# Altium PCB Rocket_Engine_Igniter.PcbDoc
Units mm, origin at the board's own origin, x right, y up, seen from the top; angles counter-clockwise.
Board outline 130 x 70 mm, 2 copper layers (L1, L2), stack 1.595 mm thick; 66 components, 37 nets, 188 pads, 121 vias.
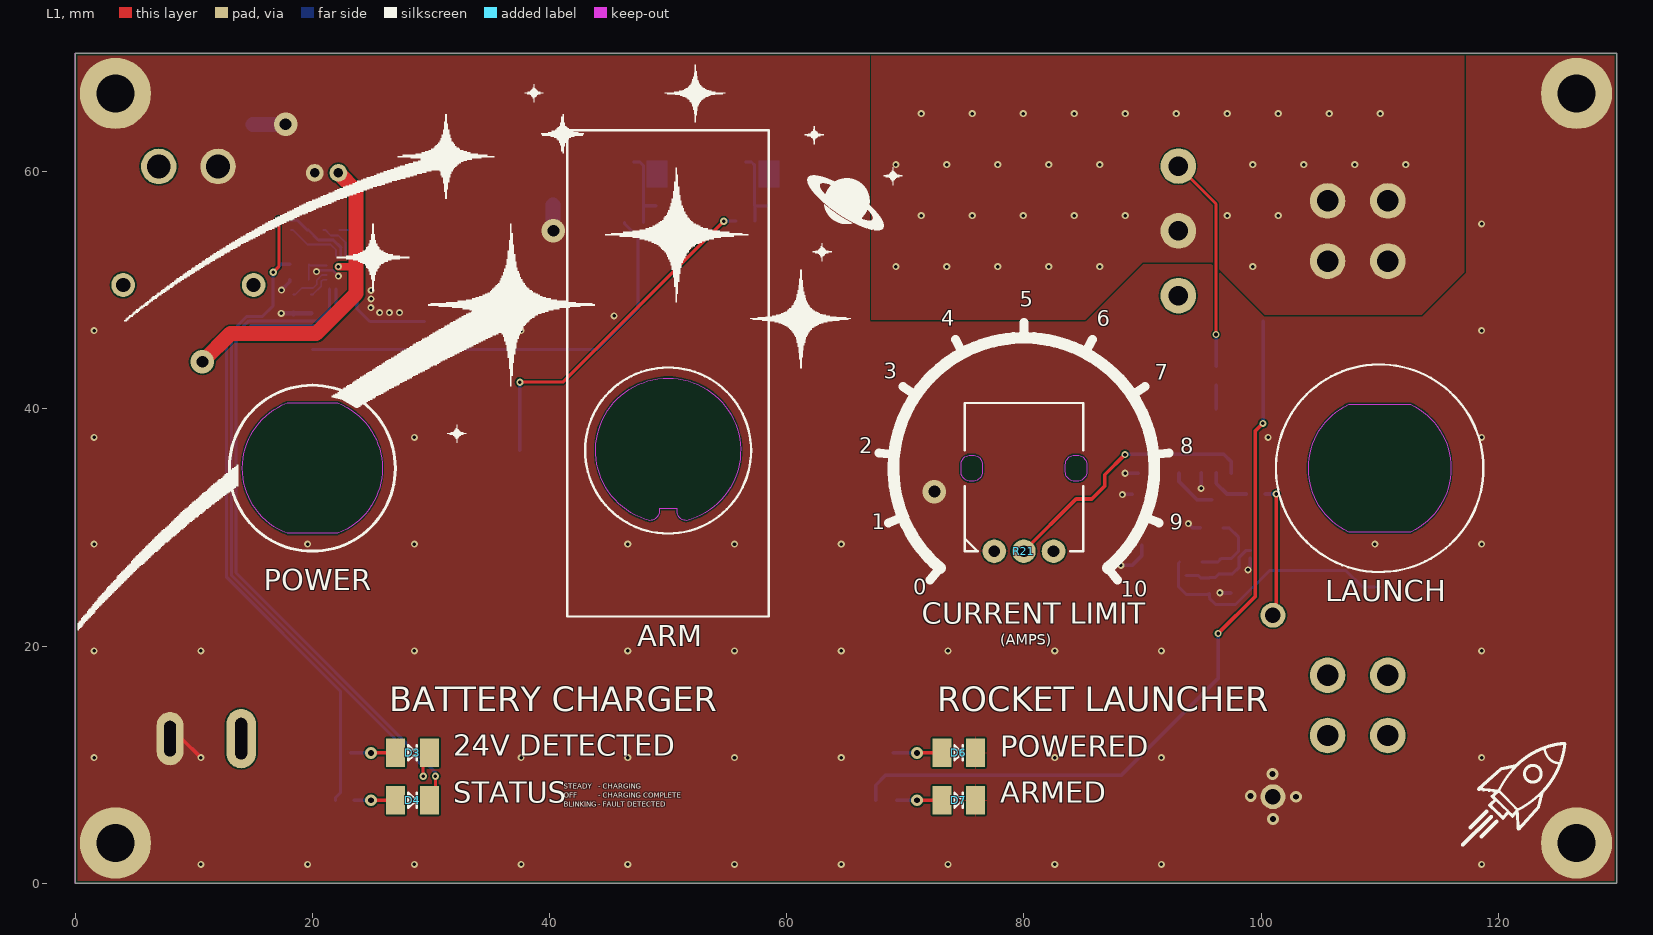
[diagram p0: L1 view]
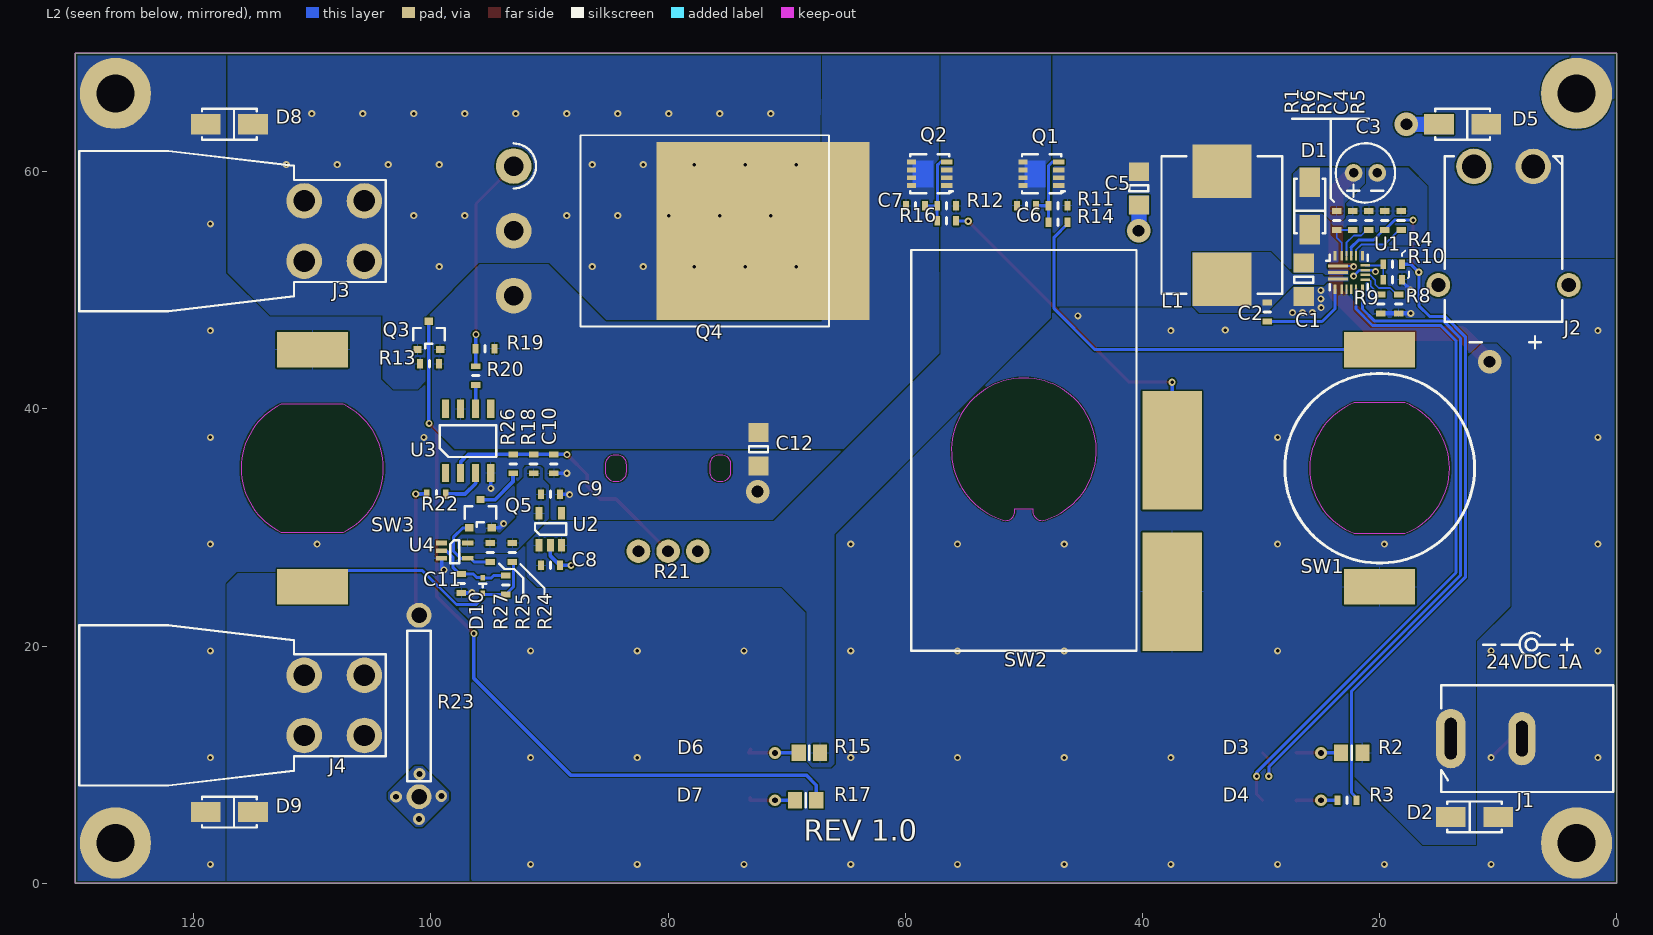
[diagram p1: L2 view, seen from below]
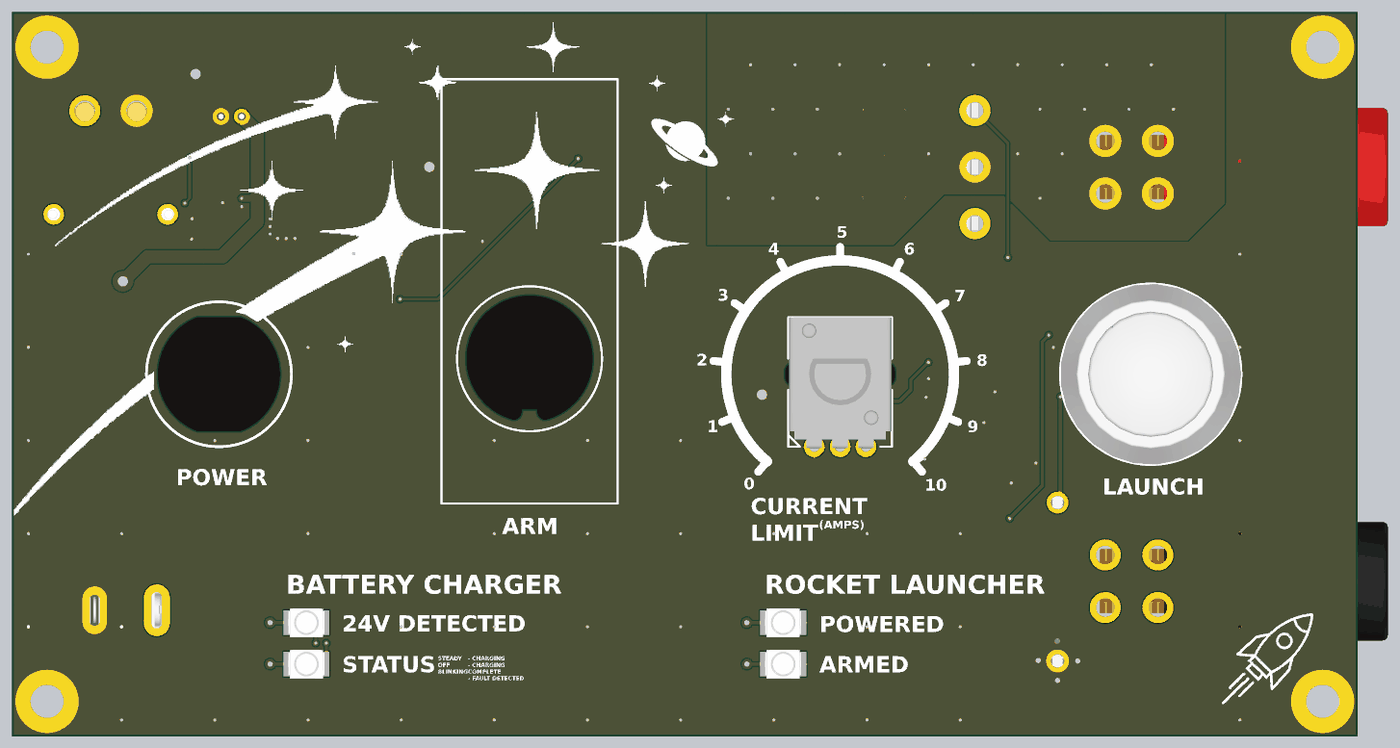
[diagram p2: 3D render of the assembled board from above, using the file's embedded part models]
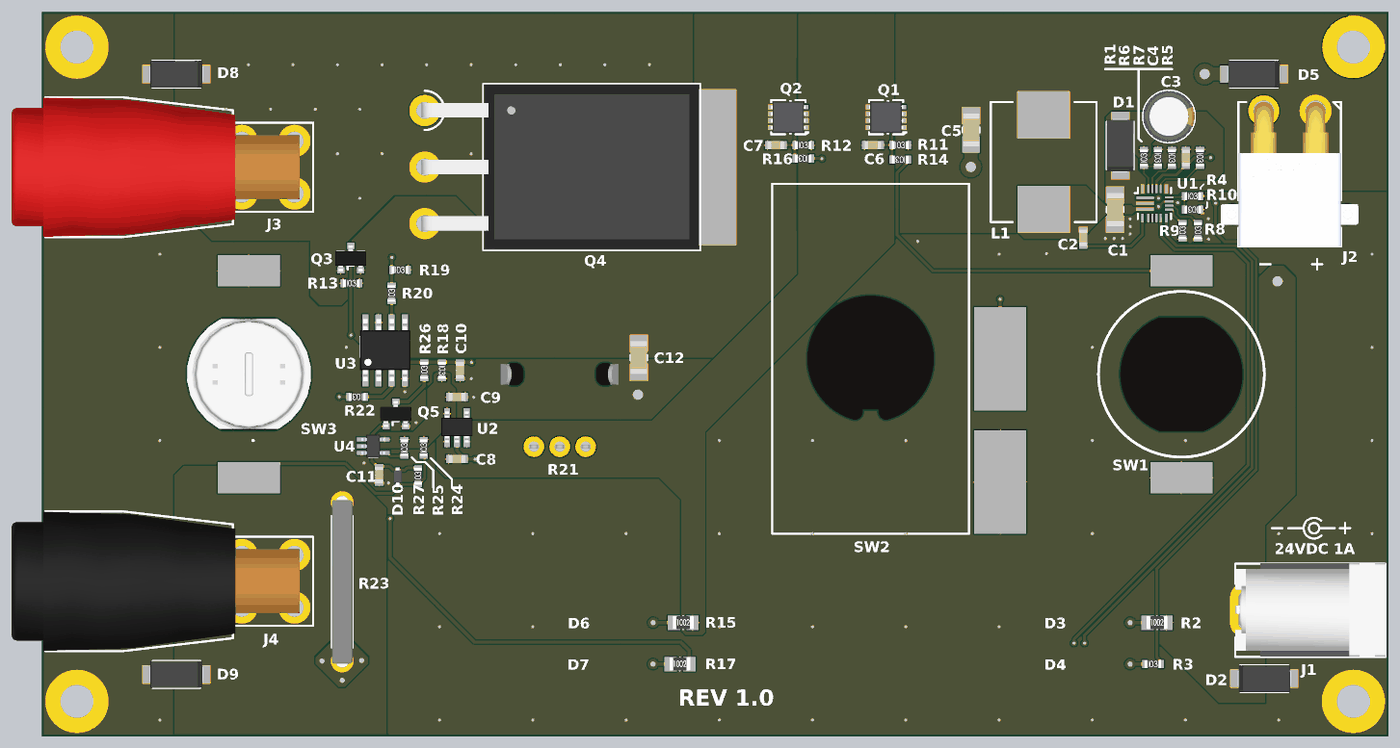
[diagram p3: 3D render of the assembled board from below, using the file's embedded part models]

## Layer stack, top to bottom
Top Solder: solder mask 0.0025, Solder Resist, Dk 0
L1: signal copper 0.0356
Core: dielectric 1.524, FR-4, Dk 4.6
L2: signal copper 0.0356
Bottom Solder: solder mask 0.0025, Solder Resist, Dk 0

## Board outline
0,0 0,70 130,70 130,0

## Design rules (kind name [scope] priority, off if disabled: settings)
BoardOutlineClearance [All] p1: gap=0.2 ignorepadtopadclearanceinfootprint=FALSE
Clearance "Stitching GND" [IsStitchingVia and InNet('GND') vs (IsVia and (Not IsStitchingVia)) Or IsPad] p1: gap=0.5 ignorepadtopadclearanceinfootprint=FALSE
Clearance [All] p2: gap=0.127 ignorepadtopadclearanceinfootprint=TRUE except(0.254: Arc-Hole Track-Hole SMDPad-Hole THPad-Hole Via-Hole Fill-Hole Poly-Hole Region-Hole Text-Hole)
ComponentClearance [All] p1: gap=0.127 collisioncheckmode=3 verticalgap=0.127 showdistances=TRUE
DiffPairsRouting [All] p1: maxlimit=0.254 minlimit=0.127 mostfreqgap=0.127 toplayer_minwidth=0.127 toplayer_maxwidth=25.4 toplayer_prefwidth=0.127 bottomlayer_minwidth=0.127 bottomlayer_maxwidth=25.4 bottomlayer_prefwidth=0.127 substack1={7DE501ED-5BBC-4F5D-AB80-627B5EEE46F3} toplayer_{7de501ed-5bbc-4f5d-ab80-627b5eee46f3}_minwidth=0.381 toplayer_{7de501ed-5bbc-4f5d-ab80-627b5eee46f3}_maxwidth=0.381 toplayer_{7de501ed-5bbc-4f5d-ab80-627b5eee46f3}_prefwidth=0.381 bottomlayer_{7de501ed-5bbc-4f5d-ab80-627b5eee46f3}_minwidth=0.381 bottomlayer_{7de501ed-5bbc-4f5d-ab80-627b5eee46f3}_maxwidth=0.381 bottomlayer_{7de501ed-5bbc-4f5d-ab80-627b5eee46f3}_prefwidth=0.381 substack2={A7599857-A2FC-403C-849A-AB8718AB1F0A} toplayer_{a7599857-a2fc-403c-849a-ab8718ab1f0a}_minwidth=0.381 toplayer_{a7599857-a2fc-403c-849a-ab8718ab1f0a}_maxwidth=0.381 toplayer_{a7599857-a2fc-403c-849a-ab8718ab1f0a}_prefwidth=0.381 bottomlayer_{a7599857-a2fc-403c-849a-ab8718ab1f0a}_minwidth=0.381 bottomlayer_{a7599857-a2fc-403c-849a-ab8718ab1f0a}_maxwidth=0.381 bottomlayer_{a7599857-a2fc-403c-849a-ab8718ab1f0a}_prefwidth=0.381 maxuncoupledlength=12.7
Height [All] p1: minheight=0 maxheight=1816.048 prefheight=12.7
HoleSize [All] p1: absolutevalues=TRUE maxlimit=6.3 minlimit=0.3 maxpercent=80.000 minpercent=20.000
HoleToHoleClearance [All] p1: gap=0.254 allowstackedmicrovias=FALSE
MinimumAnnularRing [All] p1: minimumring=0.15
MinimumSolderMaskSliver [All] p1: minsoldermaskwidth=0.1
PlaneClearance [All] p1: clearance=0.127
PlaneConnect PlaneConnectPowerPads [InPadClass('PowerPads')] p1: planeconnectstyle=Direct reliefexpansion=0.508 reliefentries=4 reliefconductorwidth=0.254 reliefairgap=0.254
PlaneConnect [All] p2: pad.planeconnectstyle=Relief pad.reliefexpansion=0.3 pad.reliefentries=4 pad.reliefconductorwidth=0.127 pad.reliefairgap=0.127 via.planeconnectstyle=Direct via.reliefexpansion=0.3 via.reliefentries=4 via.reliefconductorwidth=0.127 via.reliefairgap=0.127
PolygonConnect PolygonConnectPowerPads [All vs (InPadClass('PowerPads'))] p1: connectstyle=Direct reliefconductorwidth=0.254 reliefentries=4 polygonreliefangle="90 Angle" airgapwidth=0.254
PolygonConnect [All] p2: thpad.connectstyle=Relief thpad.reliefconductorwidth=0.127 thpad.reliefentries=4 thpad.polygonreliefangle="90 Angle" thpad.airgapwidth=0.127 smdpad.connectstyle=Relief smdpad.reliefconductorwidth=0.127 smdpad.reliefentries=4 smdpad.polygonreliefangle="90 Angle" smdpad.airgapwidth=0.127 via.connectstyle=Direct via.reliefconductorwidth=0.127 via.reliefentries=4 via.polygonreliefangle="90 Angle" via.airgapwidth=0.127
RoutingVias [All] p1: holewidth=0.3 width=0.6 viastyle="Through Hole" minholewidth=0.3 minwidth=0.6 maxholewidth=6.3 maxwidth=6.6
SilkToSilkClearance [All] p1: silktosilkclearance=0.127
SilkToSolderMaskClearance [IsPad] p1: minsilkscreentomaskgap=0.127 clearancetoexposedcopper=TRUE
SolderMaskExpansion [All] p1: expansion=0.05 istentingtop=FALSE
UnRoutedNet [All] p1: checkbadconnections=TRUE
Width Width_10mil [All] p1: maxlimit=25.4 minlimit=0.127 preferedwidth=0.254 substack1={7DE501ED-5BBC-4F5D-AB80-627B5EEE46F3} substack2={A7599857-A2FC-403C-849A-AB8718AB1F0A} minimp=50.000000 maximp=50.000000 favimp=50.000000
Width Width_6mil [All] p2: maxlimit=25.4 minlimit=0.152 preferedwidth=0.152 substack1={7DE501ED-5BBC-4F5D-AB80-627B5EEE46F3} substack2={A7599857-A2FC-403C-849A-AB8718AB1F0A} minimp=50.000000 maximp=50.000000 favimp=50.000000
Width Power_20mil [All] p3: maxlimit=25.4 minlimit=0.508 preferedwidth=0.508 substack1={7DE501ED-5BBC-4F5D-AB80-627B5EEE46F3} substack2={A7599857-A2FC-403C-849A-AB8718AB1F0A} minimp=50.000000 maximp=50.000000 favimp=50.000000
Width Power_12mil [All] p4: maxlimit=25.4 minlimit=0.305 preferedwidth=0.305 substack1={7DE501ED-5BBC-4F5D-AB80-627B5EEE46F3} substack2={A7599857-A2FC-403C-849A-AB8718AB1F0A} minimp=50.000000 maximp=50.000000 favimp=50.000000
Width Width_5mil [All] p5: maxlimit=25.4 minlimit=0.127 preferedwidth=0.127 substack1={7DE501ED-5BBC-4F5D-AB80-627B5EEE46F3} substack2={A7599857-A2FC-403C-849A-AB8718AB1F0A} minimp=50.000000 maximp=50.000000 favimp=50.000000
19 further rules are at their usual default settings.

## Classes and differential pairs
component class Pulse_Generator: C10 C11 D8 D9 D10 J3 J4 Q4 Q5 R18 R19 R20 R21 R22 R23 R24 R25 R26 R27 SW3 U3 U4
component class Power: C5 C6 C7 C8 C9 C12 D5 D6 D7 J2 Q1 Q2 Q3 R11 R12 R13 R14 R15 R16 R17 SW1 SW2 U2
component class Charger: C1 C2 C3 C4 D1 D2 D3 D4 J1 L1 R1 R2 R3 R4 R5 R6 R7 R8 R9 R10 U1
pad class PowerPads: C1-1 C1-2 C2-1 C2-2 C3-1 C3-2 C5-1 C5-2 C12-1 C12-2 D1-1 D1-2 D2-1 D2-2 D5-1 D5-2 D8-1 D8-2 D9-1 D9-2 Free-H1 Free-H2 Free-H3 Free-H4 J1-1 J1-2 J2-1 J2-2 J3-1 J4-1 L1-1 L1-2 Q1-1 Q1-2 Q1-3 Q1-5 Q1-6 Q1-7 Q1-8 Q2-1 Q2-2 Q2-3 Q2-5 Q2-6 Q2-7 Q2-8 Q4-1 Q4-2 Q4-3 R23-1 R23-2 U1-2 U1-3 U1-14 U1-19

## Components (designator, comment, footprint, x,y, rotation, side; value= is the part's Value field where it differs from the comment)
C1 "" 1206_CAP 26.4,50.9 r90 bottom
C2 "" 0603_CAP 29.475,48.175 r270 bottom
C3 "" CAP_RADIAL_5MMx11MM 22.2,59.9 r180 bottom
C4 "" 0603_CAP 19.556,55.9 r270 bottom
C5 "" 1206_CAP 40.3,58.6 r90 bottom
C6 "" 0603_CAP 49.775,57.133 r0 bottom
C7 "" 0603_CAP 59.143,57.125 r0 bottom
C8 "" 0603_CAP 89.924,26.805 r0 bottom
C9 "" 0603_CAP 89.924,32.8 r0 bottom
C10 "" 0603_CAP 89.625,35.375 r90 bottom
C11 "" 0603_CAP 97.438,25.275 r90 bottom
C12 "" 1206_CAP 72.375,36.6 r90 bottom
D1 "*" DO-214AC_SMA 25.9,57.1 r90 bottom
D2 "*" DO-214AC_SMA 12,5.6 r180 bottom
D3 "*" LED_1411 28.45,11 r180 top
D4 "*" LED_1411 28.45,7 r180 top
D5 "*" DO-214AC_SMA 13,64 r0 bottom
D6 "*" LED_1411 74.5,11 r180 top
D7 "*" LED_1411 74.5,7 r180 top
D8 "*" DO-214AC_SMA 117,64 r0 bottom
D9 "*" DO-214AC_SMA 117,6 r0 bottom
D10 "*" SOD-523 95.634,25.77 r270 bottom
J1 "*" CONN_BARREL_PLUG_PJ-037A 14,12.2 r180 bottom
J2 "" CONN_PLUG_XT30PW-M 9.55,55.45 r0 bottom
J3 "*" CONN_BANANA_RED_CT3151SP-2 108.15,55 r180 bottom locked
J4 "*" CONN_BANANA_BLK_CT3151SP-0 108.15,15 r180 bottom locked
L1 "" IND_AMRM00101040220MA1 33.3,55.5 r90 bottom
Q1 "*" PFET_POWERPAK_1212-8 48.505,59.825 r0 bottom
Q2 "*" PFET_POWERPAK_1212-8 57.943,59.825 r0 bottom
Q3 "*" SOT-23-3 101.125,45.025 r180 bottom
Q4 "*" TO-247AC_NOHOLE 66.513,63.015 r270 bottom
Q5 "*" SOT-23-3 96.775,29.98 r180 bottom
R1 "" 0603_RES 23.625,55.9 r90 bottom
R2 "" 0805_RES 22.35,11 r180 bottom
R3 "" 0603_RES 22.75,7 r180 bottom
R4 "" 0603_RES 18.9,52.2 r180 bottom
R5 "" 0603_RES 18.2,55.9 r270 bottom
R6 "" 0603_RES 22.269,55.9 r270 bottom
R7 "" 0603_RES 20.913,55.9 r270 bottom
R8 "" 0603_RES 18.4,48.85 r90 bottom
R9 "" 0603_RES 19.9,48.85 r90 bottom
R10 "" 0603_RES 18.9,50.9 r0 bottom
R11 "" 0603_RES 47.14,57.133 r180 bottom
R12 "" 0603_RES 56.507,57.125 r180 bottom
R13 "" 0603_RES 100.125,43.8 r180 bottom
R14 "" 0603_RES 47.14,55.733 r0 bottom
R15 "" 0805_RES 68.086,11 r180 bottom
R16 "" 0603_RES 56.507,55.85 r0 bottom
R17 "" 0805_RES 68.4,7 r180 bottom
R18 "" 0603_RES 91.35,35.375 r270 bottom
R19 "" 0603_RES 95.425,45.089 r180 bottom
R20 "" 0603_RES 96.225,42.8 r90 bottom
R21 "" POT_PTV09A-4x15F-xxxx 80,35 r0 top locked
R22 "" 0603_RES 99.55,32.825 r0 bottom
R23 "" RES_BR3FB50L0_0R05_1% 101,7.3 r90 bottom
R24 "" 0603_RES 93.125,27.9 r90 bottom
R25 "" 0603_RES 95,27.9 r90 bottom
R26 "" 0603_RES 93.075,35.375 r90 bottom
R27 "" 0603_RES 93.682,25.15 r90 bottom
SW1 "*" SW_KEYLOCK_SW-R-K1-A 20,35 r0 top locked
SW2 "*" SW_TOGGLE_MCR13-28A-01 50,36.5 r0 top locked
SW3 "*" SW_PUSHBUTTON_PV5S24019 110,35 r0 top locked
U1 "" QFN-19 22.6,51.5 r180 bottom
U2 "TPS7A2425DBVR" SOT-23-5 90.875,28.5 r90 bottom
U3 "*" SOIC-8_TI_PACKAGE_D 98.77,34.6 r90 bottom
U4 "*" SOT-353 98,28.05 r180 bottom

## Footprints (in the part's own frame and the unit in brackets; to place one, negate y for a bottom-side part, rotate by r counter-clockwise, add the part's x,y. Pads: shape width x height; smd on the part's side, far side on the other; paste and mask are expansions set on the pad)
0603_CAP [mm]
  rect 0.5x0.8 smd: 1(-0.8,0) 2(0.8,0)
  silkscreen extent 0,-0.28 0,0.28, body extent -0.8,-0.4 0.8,0.4, height 0.8
0603_RES [mm]
  rect 0.5x0.8 smd: 1(-0.8,0) 2(0.8,0)
  silkscreen extent 0,-0.28 0,0.28, body extent -0.8,-0.4 0.8,0.4, height 0.45
0805_RES [mm]
  rect 1.2x1.4 smd: 1(-0.9,0) 2(0.9,0)
  silkscreen extent 0,-0.6 0,0.6, body extent -1,-0.62 1,0.63, height 0.5
1206_CAP [mm]
  rect 1.6x1.7 smd: 1(-1.4,0) 2(1.4,0)
  silkscreen extent -0.25,-0.8 0.25,0.8, body extent -1.6,-0.8 1.6,0.8, height 0.79
CAP_RADIAL_5MMx11MM [mm]
  round 1.5 hole 0.8: 1(0,0) 2(2,0)
  silkscreen extent -1.5,-2.5 3.5,2.5, body extent -1.5,-2.5 3.5,2.5, height 11
CONN_BANANA_BLK_CT3151SP-0 [mm]
  round 3 hole 1.8: 1(-2.54,-2.54) 1(-2.54,2.54) 1(2.54,-2.54) 1(2.54,2.54)
  silkscreen extent -21.5,-6.75 4.35,6.75, body extent -24.74,-6.73 3.06,6.73, height 14.35
CONN_BANANA_RED_CT3151SP-2 [mm]
  round 3 hole 1.8: 1(-2.54,-2.54) 1(-2.54,2.54) 1(2.54,-2.54) 1(2.54,2.54)
  silkscreen extent -21.5,-6.75 4.35,6.75, body extent -24.74,-6.73 3.06,6.73, height 14.35
CONN_BARREL_PLUG_PJ-037A [mm]
  oval 2.5x5 hole 1 slot 3.5 at 90 deg: 1(0,0)
  oval 2.25x4.5 hole 1 slot 3 at 90 deg: 2(6,0)
  silkscreen extent -0.8,-4.5 13.7,4.5, body extent -0.8,-4.45 13.7,4.55, height 11
CONN_PLUG_XT30PW-M [mm]
  round 3 hole 2: 1(-2.5,-5) 2(2.5,-5)
  round 2 hole 1.2: 3(5.5,5) 4(-5.5,5)
  silkscreen extent -4.95,-5.85 4.95,8.1, body extent -6.65,-5.85 6.65,8.1, height 5.5
DO-214AC_SMA [mm]
  rect 2.5x1.7 smd: 1(-2,0) 2(2,0)
  silkscreen extent -2.3,-1.3 2.3,1.3, body extent -2.6,-1.3 2.6,1.3, height 2.4
IND_AMRM00101040220MA1 [mm]
  rect 4.5x5 smd: 1(-4.55,0) 2(4.55,0)
  silkscreen extent -5.8,-5.1 5.8,5.1, body extent -5.8,-5.1 5.8,5.09, height 3.8
LED_1411 [mm]
  rect 1.6x2.4 smd: 1(-1.425,0) 2(1.425,0)
  silkscreen extent -0.35,-0.63 0.35,0.63, body extent -1.75,-1.4 1.75,1.4, height 1.75
PFET_POWERPAK_1212-8 [mm]
  rect 0.99x0.405 smd: 1(-1.435,0.992) 2(-1.435,0.333) 3(-1.435,-0.333) 4(-1.435,-0.992)
  rect 0.76x0.405 smd: 5(1.55,-0.992) 6(1.55,-0.333) 7(1.55,0.333) 8(1.55,0.992)
  L1 region: -0.305,1.118 1.42,1.118 1.42,-1.118 -0.305,-1.118
  silkscreen extent -1.95,-1.65 1.65,1.65, body extent -1.65,-1.65 1.65,1.65, height 1.12
POT_PTV09A-4x15F-xxxx [mm]
  round 2 hole 1: 1(-2.5,-7) 2(0,-7) 3(2.5,-7)
  Keep-Out Layer region: 3.5,-0.3 3.5,0.3 3.561,0.606 3.734,0.866 3.994,1.039 4.3,1.1 4.3,1.1 4.5,1.1 4.806,1.039 5.066,0.866 5.239,0.606 5.3,0.3 5.3,0.3 5.3,-0.3 5.239,-0.606 5.066,-0.866 4.806,-1.039 4.5,-1.1 4.5,-1.1 4.3,-1.1 3.994,-1.039 3.734,-0.866 3.561,-0.606 3.5,-0.3
  Keep-Out Layer region: -5.3,-0.3 -5.3,0.3 -5.239,0.606 -5.066,0.866 -4.806,1.039 -4.5,1.1 -4.5,1.1 -4.3,1.1 -3.994,1.039 -3.734,0.866 -3.561,0.606 -3.5,0.3 -3.5,0.3 -3.5,-0.3 -3.561,-0.606 -3.734,-0.866 -3.994,-1.039 -4.3,-1.1 -4.3,-1.1 -4.5,-1.1 -4.806,-1.039 -5.066,-0.866 -5.239,-0.606 -5.3,-0.3
  silkscreen extent -12.23,-9.42 12.23,12.3, body extent -9.65,-9.65 9.65,9.65, height 20.3
QFN-19 [mm]
  rect 1.7x0.25 smd: 1(-0.9,0.55) 2(-0.9,0) 3(-0.9,-0.55)
  rect 0.25x0.8 smd: 4(-1.15,-1.4) 9(1.15,-1.4) 14(1.15,1.4) 19(-1.15,1.4)
  rect 0.2x0.8 smd: 5(-0.6,-1.4) 6(-0.2,-1.4) 7(0.2,-1.4) 8(0.6,-1.4) 15(0.6,1.4) 16(0.2,1.4) 17(-0.2,1.4) 18(-0.6,1.4)
  rect 0.8x0.2 smd: 10(1.4,-0.6) 11(1.4,-0.2) 12(1.4,0.2) 13(1.4,0.6)
  silkscreen extent -1.9,-1.5 1.6,1.5, body extent -1.5,-1.5 1.5,1.5, height 0.9
RES_BR3FB50L0_0R05_1% [mm]
  round 2.1 hole 1.3: 1(0,0) 2(15.3,0)
  silkscreen extent 1.3,-1 14,1, body extent -0.62,-1 15.93,1, height 15.3
SOD-523 [mm]
  rect 0.48x0.4 smd: 1(0,0) 2(1.32,0)
  silkscreen extent 0.5,-0.3 0.82,0.3, body extent -0.15,-0.4 1.45,0.4, height 0.7
SOIC-8_TI_PACKAGE_D [mm]
  rect 1.55x0.6 smd: 1(0,0) 2(0,-1.27) 3(0,-2.54) 4(0,-3.81) 5(5.4,-3.81) 6(5.4,-2.54) 7(5.4,-1.27) 8(5.4,0)
  silkscreen extent 1.35,-4.28 4.03,0.48, body extent -0.27,-4.37 5.73,0.53, height 1.75
SOT-23-3 [mm]
  rect 0.7x0.6 smd: 1(0,0) 2(1.9,0) 3(0.95,2.37)
  silkscreen extent -0.38,0.1 2.27,1.8, body extent -0.55,-0.07 2.45,2.43, height 1.1
SOT-23-5 [mm]
  rect 1.05x0.6 smd: 1(0,0) 2(0,-0.95) 3(0,-1.9) 4(2.7,-1.9) 5(2.7,0)
  silkscreen extent 0.87,-2.27 1.85,0.35, body extent -0.1,-2.45 2.9,0.55, height 1.45
SOT-353 [mm]
  rect 0.95x0.4 smd: 1(-1.1,0.65) 2(-1.1,0) 3(-1.1,-0.65) 4(1.1,-0.65) 5(1.1,0.65)
  silkscreen extent -0.38,-1.07 0.38,0.88, body extent -1.14,-1.12 1.14,1.12, height 1.1
SW_KEYLOCK_SW-R-K1-A [mm]
  rect 6x3 smd far side: 1(0,10) 2(0,-10)
  Keep-Out Layer region: -2.135,-5.5 -4.434,-3.892 -5.731,-1.403 -5.731,1.403 -4.434,3.892 -2.135,5.5 -2.135,5.5 -2.135,5.5 2.135,5.5 2.135,5.5 4.434,3.892 5.731,1.403 5.731,-1.403 4.434,-3.892 2.135,-5.5 2.135,-5.5 2.135,-5.5
  silkscreen extent -7,-7 7,7, body extent -7.5,-7.5 7.5,7.5, height 3.5
SW_PUSHBUTTON_PV5S24019 [mm]
  rect 6x3 smd far side: 1(0,10) 2(0,-10)
  Keep-Out Layer region: -2.615,-5.4 -4.696,-3.735 -5.85,-1.333 -5.85,1.333 -4.696,3.735 -2.615,5.4 -2.615,5.4 -2.615,5.4 2.615,5.4 2.615,5.4 4.696,3.735 5.85,1.333 5.85,-1.333 4.696,-3.735 2.615,-5.4 2.615,-5.4 2.615,-5.4
  silkscreen extent -8.75,-8.75 8.75,8.75, body extent -8.75,-8.75 8.75,8.75, height 7.19
SW_TOGGLE_MCR13-28A-01 [mm]
  rect 5x10 smd far side: 1(-12.5,0) 2(-12.5,-11.9)
  Keep-Out Layer region: -1.554,-5.914 -4.109,-4.526 -5.733,-2.113 -6.057,0.776 -5.008,3.488 -2.824,5.408 0,6.1 2.824,5.408 5.008,3.488 6.057,0.776 5.733,-2.114 4.109,-4.526 1.554,-5.914 1.554,-5.914 1.248,-5.853 0.988,-5.68 0.815,-5.42 0.754,-5.114 0.754,-5.114 0.75,-5.114 0.75,-4.9 0.75,-4.9 -0.75,-4.9 -0.75,-5.114 -0.754,-5.114 -0.815,-5.42 -0.988,-5.679 -1.248,-5.853 -1.554,-5.914
  silkscreen extent -8.5,-14 8.5,27, body extent -9.5,-16.9 9.5,16.88, height 24.4
TO-247AC_NOHOLE [mm]
  round 3 hole 1.651 paste-2539.97 mask+0: 1(2.54,-26.512) 2(8,-26.512) 3(13.46,-26.512)
  rect 15x18 smd: 2(8.015,-5.487)
  silkscreen extent -0.06,-26.52 16.06,0.07, body extent 0.05,-26.85 15.92,-0.05, height 5.36

## Part data
C1: library part CAP_1206_2.2uF, Capacitance=2.2uF, Case=1206, Dielectric=X7R, Manufacturer="Samsung Electro-Mechanics", Part Number=CL31B225KBHNFNE, Tolerance=10%, Voltage=50V
C2: library part CAP_0603_100nF, Capacitance=100nF, Dielectric=X7R, Manufacturer="Samsung Electro-Mechanics", Part Number=CL10B104KB8NNWC, Tolerance=10%, Voltage=50V
C3: library part CAP_RADIAL_47uF, Capacitance=47uF, Case="Radial, Can", Manufacturer="Würth Elektronik", Part Number=860020572006, Tolerance=20%, Voltage=35V
C4 C8: library part CAP_0603_1uF, Capacitance=1uF, Dielectric=X7R, Manufacturer="Samsung Electro-Mechanics", Part Number=CL10B105KA8NNNC, Tolerance=10%, Voltage=25V
C5 C12: library part CAP_1206_10uF, Capacitance=10uF, Dielectric=X5R, Manufacturer="Samsung Electro-Mechanics", Part Number=CL31A106MBHNNNE, Tolerance=20%, Voltage=50V
C6 C7: library part CAP_0603_10nF, Capacitance=10nF, Dielectric=X7R, Manufacturer="Samsung Electro-Mechanics", Part Number=CL10B103KB8NNNC, Tolerance=10%, Voltage=50V
C9: library part CAP_0603_2.2uF, Capacitance=2.2uF, Dielectric=X7R, Manufacturer="Samsung Electro-Mechanics", Part Number=CL10B225KP8NNNC, Tolerance=10%, Voltage=10V
C10: library part CAP_0603_1nF, Capacitance=1nF, Dielectric=X7R, Manufacturer="KYOCERA AVX", Part Number=KGM15AR71H102KT, Tolerance=10%, Voltage=50V
C11: library part CAP_0603_3.3nF, Capacitance=3.3nF, Dielectric=X7R, Manufacturer="Samsung Electro-Mechanics", Part Number=CL10B332KB8NNNC, Tolerance=10%, Voltage=50V
D1: library part DIODE_SCHOTTKY_40V_2A, Average Forward Current=2A, Manufacturer="Diodes Incorporated", Max Reverse Voltage=40V, Package=DO-214AC_SMA, Part Number=B240AE-13
D2: library part DIODE_TVS_33V_UNIDIR, Manufacturer="Diodes Incorporated", Package=DO-214AC_SMA, Part Number=SMAJ33AQ-13-F, Reverse Standoff Voltage=33V
D3: library part LED_BLUE_150141BS73100, Manufacturer="Würth Elektronik", Package="SMD 1411", Part Number=150141BS73100
D4: library part LED_AMBER_150141AS73100, Manufacturer="Würth Elektronik", Package="SMD 1411", Part Number=150141AS73100
D5 D8 D9: library part DIODE_TVS_20V_UNIDIR, Manufacturer="Diodes Incorporated", Package=DO-214AC_SMA, Part Number=SMAJ20AQ-13-F, Reverse Standoff Voltage=20V
D6: library part LED_GREEN_150141GS73100, Manufacturer="Würth Elektronik", Package="SMD 1411", Part Number=150141GS73100
D7: library part LED_RED_150141RS73100, Manufacturer="Würth Elektronik", Package="SMD 1411", Part Number=150141RS73100
D10: library part DIODE_RB520S30T5G, Manufacturer="ON Semiconductor", Max Reverse Voltage=30V, Package=SOD-523, Part Number=RB520S30T5G
J1: library part CONN_BARREL_PLUG_PJ-037A, Manufacturer="CUI Devices", Max Current=2.5A, Part Number=PJ-037A, Rated Voltage=24V, Mating Diameter="2.1mm ID, 5.5mm OD"
J2: library part CONN_PLUG_XT30PW-M, Manufacturer=AMASS, Part Number=XT30PW-M
J3: library part CONN_BANANA_RED_CT3151SP-2, Colour=Red, Manufacturer="Cal Test Electronics", Part Number=CT3151SP-2
J4: library part CONN_BANANA_BLK_CT3151SP-2_1, Colour=Black, Manufacturer="Cal Test Electronics", Part Number=CT3151SP-0
L1: library part IND_AMRM00101040220MA1_22U0, Inductance=22uH, Manufacturer="Pulse Electronics", Part Number=AMRM00101040220MA1, Saturation Current=5A, Tolerance=20%, DCR=0.066Ohm
Q1 Q2: library part PFET_SIS413DN, Manufacturer="Vishay Siliconix", Package="PowerPAK® 1212-8", Part Number=SIS413DN-T1-GE3
Q3: library part PFET_DMP610DL, Manufacturer="Diodes Incorporated", Package=SOT-23-3, Part Number=DMP610DL-7
Q4: library part PFET_IRFP9140, Manufacturer=Vishay, Package=TO-247-3, Part Number=IRFP9140PBF
Q5: library part NFET_AS2302, Manufacturer="ANBON SEMICONDUCTOR (INT'L) LIMITED", Package=SOT-23-3, Part Number=AS2302
R1 R4 R11 R12 R19: library part RES_0603_10K, Manufacturer="Stackpole Electronics Inc", Part Number=RMCF0603FT10K0, Power Rating=0.1W, Resistance=10K, Temperature Coefficient=100ppm, Tolerance=1%
R2: library part RES_0805_2K0, Manufacturer="Stackpole Electronics Inc", Part Number=RNCP0805FTD2K00, Power Rating=0.25W, Resistance=2K0, Temperature Coefficient=100ppm, Tolerance=1%
R3: library part RES_0603_330R, Manufacturer="Stackpole Electronics Inc", Part Number=RMCF0603FT330R, Power Rating=0.1W, Resistance=330R, Temperature Coefficient=100ppm, Tolerance=1%
R5 R7: library part RES_0603_95K3, Manufacturer="Stackpole Electronics Inc.", Part Number=RMCF0603FT95K3, Power Rating=0.1W, Resistance=95K3, Temperature Coefficient=100ppm, Tolerance=1%
R6: library part RES_0603_150K, Manufacturer="Stackpole Electronics Inc", Part Number=RMCF0603FG150K, Power Rating=0.1W, Resistance=150K, Temperature Coefficient=100ppm, Tolerance=1%
R8 R13 R25: library part RES_0603_100K, Manufacturer=Stackpole, Part Number=RMCF0603FT100K, Power Rating=0.1W, Resistance=100K, Temperature Coefficient=100ppm, Tolerance=1%
R9: library part RES_0603_NOSTUFF, NOSTUFF=NOSTUFF
R10: library part RES_0603_15K, Manufacturer="Stackpole Electronics Inc", Part Number=RMCF0603FG15K0, Power Rating=0.1W, Resistance=15K, Temperature Coefficient=100ppm, Tolerance=1%
R14 R16: library part RES_0603_1K, Manufacturer="Stackpole Electronics Inc", Part Number=RMCF0603FT1K00, Power Rating=0.1W, Resistance=1K, Temperature Coefficient=100ppm, Tolerance=1%
R15: library part RES_0805_560R, Manufacturer="Vishay Dale", Part Number=CRCW0805560RFKEAHP, Power Rating=0.5W, Resistance=560R, Temperature Coefficient=100ppm, Tolerance=1%
R17: library part RES_0805_680R, Manufacturer="Vishay Dale", Part Number=RCS0805680RFKEA, Power Rating=0.5W, Resistance=680R, Temperature Coefficient=100ppm, Tolerance=1%
R18 R24 R27: library part RES_0603_4K02, Manufacturer="Stackpole Electronics Inc", Part Number=RMCF0603FT4K02, Power Rating=0.1W, Resistance=4K02, Temperature Coefficient=100ppm, Tolerance=1%
R20: library part RES_0603_10R, Manufacturer="Stackpole Electronics Inc", Part Number=RMCF0603FT10R0, Power Rating=0.1W, Resistance=10R, Temperature Coefficient=100ppm, Tolerance=1%
R21: library part POT_1K_PTV09A-4015F-B102, Manufacturer="Bourns Inc.", Part Number=PTV09A-4015F-B102, Power Rating=0.05W, Resistance=1K, Tolerance=20%
R22 R26: library part RES_0603_0R0, Resistance=0R0
R23: library part RES_BR3FB50L0_0R05_1%, Manufacturer="Stackpole Electronics", Part Number=BR3FB50L0, Power Rating=3W, Resistance=0R05, Tolerance=1%
SW1: library part SW_KEYLOCK_SW-R-K1-A, Manufacturer="Adam Tech", Part Number=SW-R-K1-A
SW2: library part SW_TOGGLE_MCR13-28A-01, Manufacturer=Multicomp, Part Number=MCR13-28A-01
SW3: library part SW_PUSHBUTTON_PV5S24019, Manufacturer=E-Switch, Part Number=PV5S24019
U1: library part MP2659, Manufacturer="Monolithic Power Systems", Package=QFN-19, Part Number=MP2659-0000
U2: Manufacturer="Texas Instruments", Package=SOT-23-5, Part Number=TPS7A2425DBVR
U3: library part LM7321, Manufacturer="Texas Instruments", Package=SOIC-8, Part Number=LM7321MAX/NOPB
U4: library part SN74LVC1G17, Manufacturer="Texas Instruments", Package=SOT-353, Part Number=SN74LVC1G17DCKR

## Free pads (board coordinates)
  round 6 hole 3.2: H1(3.4,66.6) H2(3.4,3.4) H3(126.6,3.4) H4(126.6,66.6)

## Via types
v1: diameter 0.6, hole 0.3, L1 to L2, tented both sides, 109 vias
v2: diameter 1, hole 0.5, L1 to L2, tented both sides, 8 vias
v3: diameter 2, hole 1, L1 to L2, tented both sides, 4 vias

## Nets (pads, with @x,y where several pads share a name; then routed paths per layer and width w, separated by ;. In a path a pad name is that pad's centre, name@x,y a point inside that pad or via, vN(x,y) a via of type N, cw(c..) or ccw(c..) an arc to the next point about the centre after c; other vN are vias at no path point)
CHGR_ACOK_N: D3.1 U1.9 | length 56.8
  L1 w0.254: v1(29.35,9.025) 29.35,10.475 D3.1
  L2 w0.254: U1.9 21.45,48.425 20.45,47.425 14.65,47.425 13.175,45.95 13.175,25.975 29.35,9.8 v1(29.35,9.025)
CHGR_BST: C2.2 U1.4 | length 7.8
  L2 w0.254: U1.4 23.75,48.475 24.85,47.375 C2.2
CHGR_CELL: R9.2 U1.10 | length 2.1
  L2 w0.152: R9.2 20.05,49.65 20.75,50.35 20.75,50.75 20.9,50.9 U1.10
CHGR_ILIM: R7.2 U1.17 | length 3.4
  L2 w0.152: R7.2 21.075,55.1 21.55,54.625 22.175,54.625 22.8,54 U1.17
CHGR_ISET: R5.2 U1.15 | length 5
  L2 w0.152: R5.2 18.35,55.1 19.575,53.875 21.525,53.875 22,53.4 U1.15
CHGR_NTC: R4.1 R10.2 U1.13 | length 2.8
  L2 w0.152: R10.2 19.7,52.1 R4.1 19.8,52.1 U1.13
CHGR_PMID: C1.2 D1.1 U1.2 U1.19
CHGR_STAT_N: D4.1 U1.8 | length 57.1
  L1 w0.254: D4.1 30.375,7.5 v1(30.375,9.025)
  L2 w0.254: U1.8 22,48.436 20.608,47.044 14.844,47.044 13.556,45.756 13.556,26.194 30.375,9.375 v1(30.375,9.025)
CHGR_SW: C2.1 L1.1 U1.3
CHGR_VB: R8.2 U1.11 | length 3.7
  L2 w0.152: R8.2 18.55,49.65 19.1,50.2 20.081,50.2 20.375,50.494 20.375,50.862 20.813,51.3 U1.11
CHGR_VCC_5V0: C4.2 R3.2 R4.2 U1.16 | length 64.2
  L1 w0.254: v1(16.7,51.525) 17.175,52 v1(17.175,55.925)
  L2 w0.203: U1.16 22.4,53.625
  L2 w0.254: v1(17.175,55.925) 18.731,55.925 C4.2 19.575,55.082 19.668,55.082 20.5,54.25 21.775,54.25 22.4,53.625 ; R4.2 17.375,52.2 v1(16.7,51.525) 16.7,48.707 15.799,47.806 14.492,47.806 12.775,46.089 12.775,25.8 22.375,16.2 22.375,7.64 21.95,7.215 R3.2
CHGR_VDPM: R1.1 R6.2 U1.18 | length 3.7
  L2 w0.152: R6.2 R1.1 23.625,54.425 23.2,54 U1.18
GND: C1.1 C3.2 C4.1 C5.1 C8.1 C9.1 C10.1 C11.1 C12.1 D2.2 D5.2 D6.1 D7.1 D8.2 D9.2 J1.2 J2.2 pad.H1 pad.H2 pad.H3 pad.H4 Q5.2 R5.1 R6.1 R7.1 R8.1 R9.1 R10.1 R21.1 R23.1 SW1.2 SW2.2 SW3.1 U1.5 U1.6 U1.7 U1.12 U2.2 U3.4 U4.3 | length 23.3
  L1 w0.305: J1.2 9,12.2 v1(10.6,10.6)
  L2 w0.203: v1(20.35,51.575) 20.475,51.7 U1.12 21.7,51.7 v1(22.2,51.2)
  L2 w0.305: v1(17.4,50.025) 18.1,50.725 R10.1 ; v1(88.175,26.8) 88.18,26.805 C8.1 89.925,27.606 U2.2 ; v1(88.3,32.775) 88.325,32.8 C9.1 ; v1(88.538,34.575) C10.1 ; v1(93.875,30.325) 94.22,29.98 Q5.2 ; v1(94.95,33.297) 94.96,33.307 U3.4 ; v1(96.53,24.5) 96.555,24.475 C11.1 ; v1(98.9,26.425) 99.1,26.625 U4.3
  L2 w0.381: v1(17.375,48.05) R8.1 R9.1
  L2 w1.27: D5.2 v3(17.75,64) ; C5.1 40.3,55.05 v3(40.325,55.025)
  other v1: 10.6,1.6 19.6,1.6 28.6,1.6 37.6,1.6 46.6,1.6 55.6,1.6 64.6,1.6 73.6,1.6 82.6,1.6 91.6,1.6 118.6,1.6 1.6,10.6 37.6,10.6 46.6,10.6 55.6,10.6 64.6,10.6 82.6,10.6 91.6,10.6 118.6,10.6 1.6,19.6 10.6,19.6 28.6,19.6 46.6,19.6 55.6,19.6 64.6,19.6 73.6,19.6 82.6,19.6 91.6,19.6 118.6,19.6 1.6,28.6 19.6,28.6 28.6,28.6 46.6,28.6 55.6,28.6 64.6,28.6 109.6,28.6 118.6,28.6 1.6,37.6 28.6,37.6 100.6,37.6 118.6,37.6 1.6,46.6 37.6,46.6 118.6,46.6 33.025,46.65 45.45,47.85 25.675,48.125 26.5,48.125 27.35,48.125 24.943,48.55 24.95,49.275 24.95,50 118.6,55.6
  other v2: 101,5.425 102.95,7.3 99.125,7.35 100.975,9.225
  other v3: 72.45,33.025
NetC6_1: C6.1 Q1.4 R11.1 R14.2 | length 6.8
  L2 w0.254: Q1.4 47.612,60.818 47.94,60.489 R11.1 ; R14.2 R11.1 ; C6.1 R11.1
NetC7_1: C7.1 Q2.4 R12.1 R16.2 | length 6.6
  L2 w0.254: Q2.4 57.033,60.817 57.3,60.55 57.3,57.132 R12.1 ; R16.2 R12.1 ; C7.1 R12.1
NetD3_2: D3.2 R2.1 | length 3.8
  L1 w0.305: v2(24.95,11) D3.2
  L2 w0.305: R2.1 v2(24.95,11)
NetD4_2: D4.2 R3.1 | length 3.6
  L1 w0.305: v2(24.95,7) 27,7 27.009,6.988 D4.2@27.025,6.968
  L2 w0.305: R3.1 v2(24.95,7) ; v2@24.95,6.984 24.95,6.968 v2@24.95,6.984 ; v2@24.95,6.984 v2(24.95,7) ; v2@24.95,6.984 v2(24.95,7)
NetD6_2: D6.2 R15.1 | length 4.6
  L1 w0.305: v2(70.986,11) D6.2 73.2,11 73.17,11.054 73.032,11.296 D6.2@73.061,11.3
  L2 w0.305: R15.1 v2(70.986,11)
NetD7_2: D7.2 R17.1 | length 4
  L1 w0.305: v2(71,7) D7.2 D7.2@73.075,7.191
  L2 w0.305: R17.1 v2(71,7)
NetQ3_3: Q3.3 R17.2 | length 65.6
  L1 w0.305: v1(96.375,21.063) 99.525,24.213 99.525,38.15 v1(100.15,38.775)
  L2 w0.305: R17.2 67.5,8.275 68.35,9.125 88.225,9.125 96.375,17.275 v1(96.375,21.063) ; v1(100.15,38.775) 100.175,38.8 Q3.3
NetQ4_1: Q4.1 R19.1 R20.2 | length 18.2
  L1 w0.254: Q4.1 96.2,57.3 v1(96.2,46.275)
  L2 w0.254: Q4.1@93,60.5 Q4.1
  L2 w0.305: v1(96.2,46.275) 96.225,46.25 R19.1 R20.2
NetQ5_3: Q5.3 R26.1 | length 4.1
  L2 w0.305: R26.1 93.075,33.875 94.6,32.35 Q5.3
NetR14_1: R14.1 SW1.1 | length 36.6
  L2 w0.254: SW1.1 44,45 47.448,48.448 47.448,54.477 46.34,55.585 R14.1
NetR16_1: R16.1 SW2.1 | length 29.6
  L1 w0.254: v1(37.5,42.25) 41.118,42.25 v1(54.693,55.825)
  L2 w0.254: v1(54.693,55.825) 54.718,55.85 R16.1
  L2 w0.305: SW2.1 v1(37.5,42.25)
PG_CURRENT_FB: R22.1 U3.3 | length 3.8
  L2 w0.305: U3.3 96.23,33.72 97.125,32.825 R22.1
PG_ISET: C10.2 R18.1 R21.2 R26.2 U3.2 | length 22.6
  L1 w0.305: R21.2 84.402,32.402 85.727,32.402 86.825,33.5 86.825,34.45 v1(88.525,36.15)
  L2 w0.305: v1(88.525,36.15) 88.55,36.175 C10.2 R18.1 R26.2 96.85,36.175 97.5,35.525 U3.2
PG_LAUNCH_DBNC_N: Q5.1 R25.1 U4.4 | length 6.3
  L2 w0.254: R25.1 96.347,27.1 96.647,27.4 U4.4 97.5,27.4 98.112,28.011 98.112,29.172 97.304,29.98 Q5.1
PG_LAUNCH_FLT_N: C11.2 D10.1 R27.2 U4.2 | length 7
  L2 w0.254: R27.2 94.711,25.95 94.937,25.725 95.589,25.725 D10.1 96.12,25.77 96.45,26.1 97.413,26.1 C11.2 97.575,26.075 98.15,26.65 98.15,27.5 98.7,28.05 U4.2
PG_LAUNCH_N: D10.2 R24.1 R27.1 SW3.2 | length 21.8
  L2 w0.254: R24.1 93.028,27.003 93.028,25.004 R27.1 95.534,24.35 D10.2 95.634,24.041 96.175,23.5 97.85,23.5 100.725,26.375 107.148,26.375 108.523,25 SW3.2
PG_LOAD_N: D9.1 J4.1 R22.2 R23.2 | length 11.3
  L1 w0.305: R23.2 101.275,22.875 v1(101.275,32.825)
  L2 w0.305: R22.2 v1(101.275,32.825)
PG_LOAD_P: D8.1 J3.1 Q3.1 Q4.2 R13.1
  other v1: 69.2,52 73.5,52 77.8,52 82.1,52 86.4,52 99.3,52 71.35,56.3 75.65,56.3 79.95,56.3 84.25,56.3 88.55,56.3 97.15,56.3 101.45,56.3 69.2,60.6 73.5,60.6 77.8,60.6 82.1,60.6 86.4,60.6 99.3,60.6 103.6,60.6 107.9,60.6 112.2,60.6 71.35,64.9 75.65,64.9 79.95,64.9 84.25,64.9 88.55,64.9 92.85,64.9 97.15,64.9 101.45,64.9 105.75,64.9 110.05,64.9
PG_PFET_GATE: R20.1 U3.6 | length 2
  L2 w0.305: R20.1 96.225,40.005 U3.6
VBATT_14V8: C5.2 D5.1 J2.1 L1.2 Q1.1 Q1.2 Q1.3 R11.2 U1.14
VBATT_14V8_PG: C7.2 C12.2 Q2.5 Q2.6 Q2.7 Q2.8 Q3.2 Q4.3 R13.2 R19.2 U3.7
VBATT_14V8_SW: C6.2 C8.2 Q1.5 Q1.6 Q1.7 Q1.8 Q2.1 Q2.2 Q2.3 R12.2 R15.2 U2.1 U2.3
VCHGR_24V0: C3.1 D1.2 D2.1 J1.1 R1.2 R2.2 U1.1 | length 29
  L1 w0.635: v1(22.2,52) 23.65,52 23.7,52.05
  L1 w1.27: v3(10.725,43.975) 13.1,46.35 20.325,46.35 23.7,49.725 23.7,52.05 23.7,58.4 C3.1
  L2 w0.152: v1(22.2,52) 22.25,52.05 U1.1
VLDO_2V5: C9.2 R18.2 R24.2 R25.2 U2.5 U4.5
pads on no net: J2.3 J2.4 R21.3 U2.4 U3.1 U3.5 U3.8 U4.1

## Polygon pours and split planes (outlines as drawn)
GND on L1 "GND_PLANE_TOP" (solid, pour order 32): 0.2,69.8 0.2,0.2 129.8,0.2 129.8,69.8
PG_LOAD_P on L1 "PG_LOAD_P_SHAPE2" (solid, pour order 18): 100.325,47.925 113.55,47.925 117.15,51.525 117.15,69.825 67.15,69.825 67.15,47.5 85.16,47.5 90.025,52.35 95.9,52.35
GND on L2 "GND_PLANE_BOT" (solid, pour order 30): 0.2,69.8 0.2,0.2 129.8,0.2 129.8,69.8
PG_LOAD_N on L2 "PG_LOAD_N_SHAPE1" (solid, pour order 22): 117.2,0.225 117.2,25.225 116.3,26.125 100.85,26.125 96.75,22.025 96.75,0.25 96.775,0.225
CHGR_PMID on L2 "CHGR_PMID_SHAPE1" (solid, pour order 0): 24.175,54.672 24.175,55.775 24.85,56.45 27.298,56.45 27.302,51.5 24.8,51.5 24.6,51.3 22.65,51.3 22.65,51.75 24.425,51.75 24.525,51.85 24.525,52.209 24.384,52.35 23.475,52.35 23.475,53.972
CHGR_SW on L2 "CHGR_SW_SHAPE1" (solid, pour order 2): 22.65,51.125 24.4,51.125 24.625,51.35 27.35,51.35 29.2,53.2 35.8,53.2 35.8,48.7 35.2,48.1 29.569,48.1 27.285,50.45 24.725,50.45 24.425,50.75 22.65,50.75
GND on L2 "GND_SHAPE1" (solid, pour order 4): 24.475,50.3 24,49.825 24,48.6 24.975,47.625 29.525,47.625 29.525,48 27.225,50.3
VBATT_14V8_SW on L2 "VBATT_14V8_SW_SHAPE1" (solid, pour order 12): 70.421,25.004 68.3,22.883 68.3,10.275 67.825,9.8 66.275,9.8 65.975,10.1 65.975,29.45 47.725,47.7 47.725,48.625 47.725,58.42 47.725,69.8 57,69.796 57,44.625 71.1,30.525 90.037,30.525 90.05,30.538 91.913,28.674 91.913,25.863 91.054,25.004
VBATT_14V8 on L2 "VBATT_14V8_SHAPE1" (solid, remove dead copper, pour order 6): 15.85,58.817 15.85,54.475 16.65,53.675 21.406,53.675 21.725,53.356 21.725,52.45 21.625,52.35 20.4,52.35 20,52.75 0.2,52.75 0.2,69.775 0.225,69.8 47.575,69.8 47.575,48.65 27.45,48.65 27.45,59.85 26.813,60.487 17.521,60.487
VCHGR_24V0 on L2 "VCHGR_24V0_SHAPE1" (solid, pour order 10): 27.285,59.853 26.764,60.375 21.25,60.375 21.25,59.025 22.95,57.325 22.95,56.125 23.125,55.95 24.15,55.95 24.8,56.6 27.285,56.6
VBATT_14V8_PG on L2 "VBATT_14V8_PG_SHAPE1" (solid, pour order 14): 85.297,47.403 90.094,52.2 95.875,52.2 100.15,47.925 100.15,38.775 98,36.625 65.15,36.625 57.125,44.65 57.175,57.175 57.125,69.8 67.006,69.799 67.063,47.403
PG_LOAD_P on L2 "PG_LOAD_P_SHAPE1" (solid, pour order 16): 100.46,47.815 100.46,42.315 101.122,41.653 103.178,41.653 104.075,42.55 104.075,47.9 113.55,47.9 117.15,51.5 117.15,69.8 67.15,69.8 67.15,47.475 85.16,47.475 90.025,52.325 95.95,52.325
VLDO_2V5 on L2 "VLDO_2V5_SHAPE1" (solid, pour order 24): 97.44,27.875 97.785,28.233 97.785,29.065 97.45,29.4 94.175,29.4 92.775,30.8 92.775,33.606 92.175,34.206 92.175,34.975 91.975,35.175 90.767,35.175 90.55,35.012 90.55,34.061 90.05,33.561 90.05,30.75 92.925,27.875
VCHGR_24V0 on L2 "VCHGR_24V0_SHAPE2" (solid, pour order 26): 11.9,20.45 9,23.35 9,44.375 10.125,45.5 11.4,45.5 12.525,44.375 12.525,25.684 20.709,17.5 21.375,17.5 22.35,16.525 22.35,9.225 16.375,3.25 11.9,3.25
GND on L2 "GND_SHAPE2" (solid, pour order 20): 100.689,9.864 98.486,7.661 98.486,7.014 100.714,4.786 101.286,4.786 103.589,7.089 103.589,7.659 101.384,9.864
GND on L2 "GND_SHAPE3" (solid, pour order 28): 22.875,56.1 22.5,55.725 18.038,55.725 17.65,55.337 17.65,54 17.475,53.825 16.7,53.825 15.25,55.275 15.25,58.756 16.844,60.35 21.1,60.35 21.1,58.975 22.875,57.2

## Keep-outs
Keep-Out Layer:
  the board outline again, w0.1

## Silkscreen, mask and mechanical layers (free items; w line width, h text height)
Top Overlay:
  drawing of 20 lines, arcs and shapes, not listed
  text "POWER" at 15.9,24.1 h3.05
  text "LAUNCH" at 105.4,23.2 h3.05
  text "CURRENT LIMIT" at 71.4,21.3 h3.05
  text "(AMPS)" at 78,19.8 h1.52
  text "ARM" at 47.4,19.4 h3.05
  text "BATTERY CHARGER" at 26.5,13.8 h3.56
  text "ROCKET LAUNCHER" at 72.7,13.8 h3.56
  text "24V DETECTED" at 31.9,10.16 h3.05
  text "POWERED" at 78,10.1 h3.05
  text "STEADY / OFF / BLINKING" at 41.2,6.3 h0.76
  text "- CHARGING / - CHARGING COMPLETE / - FAULT DETECTED" at 44.1,6.3 h0.76
  text "STATUS" at 31.9,6.2 h3.05
  text "ARMED" at 78,6.2 h3.05
Bottom Overlay:
  circle w0.2: c7.2,20.125 r0.5
  lines w0.15: 17.525,51.6 17.525,51.125 17.612,51.038 ; 17.85,53.35 18.125,53.075 18.125,52.875
  lines w0.2: 3.7,20.125 4.7,20.125 ; 4.2,19.625 4.2,20.625 ; 5.2,20.125 6.7,20.125 ; 6.4,45.625 7.4,45.625 ; 6.493,19.418 ccw(c7.2,20.125) 6.493,20.832 ; 6.9,45.125 6.9,46.125 ; 8.2,20.125 9.7,20.125 ; 10.25,20.125 11.25,20.125 ; 11.4,45.625 12.4,45.625 ; 20.9,64.475 27.375,64.475 ; 23.85,57.475 24.125,57.75 24.125,64.475 ; 90.425,24.05 90.425,24.875 91.625,26.075 92.45,26.9 ; 92.2,24.05 92.2,25.725 92.975,26.5 93.8,26.5 94.262,26.962
  text "24VDC 1A" at 11.025,17.65 h2
  text "REV 1.0" at 68.575,3 h3.05

## Text inside footprints (layer, text, board x,y; h text height)
R21: Top Overlay "10" at 88.17,23.755 h2.2; Top Overlay "9" at 92.284,29.402 h2.2; Top Overlay "8" at 93.175,35.806 h2.2; Top Overlay "7" at 91.048,42.039 h2.2; Top Overlay "6" at 86.15,46.567 h2.2; Top Overlay "5" at 79.654,48.195 h2.2; Top Overlay "4" at 73.047,46.572 h2.2; Top Overlay "3" at 68.171,42.108 h2.2; Top Overlay "2" at 66.126,35.849 h2.2; Top Overlay "1" at 67.161,29.418 h2.2; Top Overlay "0" at 70.68,23.892 h2.2